# EAGLE board CzujnikWilgotnosciGleby_Rafal.Brauner (EAGLE 9.6.2)

Size 160 x 100 mm. Coordinates in mm from the lower left corner, seen from the top.
Outline: 0,0 160,0 160,100 0,100 0,0
Copper layers (1*16): Top 0.035mm / dielectric 1.5mm / Bottom 0.035mm
Design rules "default": minimum track width 6mil, minimum drill 0.35mm, track to track 6mil, track to pad 6mil, pad to pad 6mil, via to via 6mil, smd to smd 6mil, copper to edge 40mil, drill to drill 6mil, minimum pad ring 10mil, minimum via ring 8mil, stop-mask expansion 4mil, vias tented up to drill 0mil, thermal gap 10mil

## Footprints (pad centres in the part's own frame; a part is rotated, then mirrored left to right if it is on the bottom)
0603 = smd 1.1 x 1: 1 -0.85,0; 2 0.85,0
AB9V = drill 1.118 pad 3.15 octagon: + 0,2.54; - 0,-2.54
DIL28-3 = drill 0.813 long: 1 -16.51,-3.81; 2 -13.97,-3.81; 3 -11.43,-3.81; 4 -8.89,-3.81; 5 -6.35,-3.81; 6 -3.81,-3.81; 7 -1.27,-3.81; 8 1.27,-3.81; 9 3.81,-3.81; 10 6.35,-3.81; 11 8.89,-3.81; 12 11.43,-3.81; 13 13.97,-3.81; 14 16.51,-3.81; 15 16.51,3.81; 16 13.97,3.81; 17 11.43,3.81; 18 8.89,3.81; 19 6.35,3.81; 20 3.81,3.81; 21 1.27,3.81; 22 -1.27,3.81; 23 -3.81,3.81; 24 -6.35,3.81; 25 -8.89,3.81; 26 -11.43,3.81; 27 -13.97,3.81; 28 -16.51,3.81
TO220H = drill 1.118 long: 1 -2.54,-10.16; 2 0,-10.16; 3 2.54,-10.16 | hole 3.302: 0,4.826
AC01 = drill 1.1 pad 2: 1 -8.9,0; 2 8.9,0
RDT1034 = drill 0.8: A 3.175,-0.635; A1 -3.175,0.635; B 0.65,1.9
SOIL-MOISTURE-SENSOR = drill 1 square: J1.1 -11.43,-3.81; J2.1 13.335,-1.27 | drill 1: J1.2 -11.43,-1.27; J1.3 -11.43,1.27; J1.4 -11.43,3.81; J2.2 13.335,1.27 | hole 3.2: -6.35,0
HC49US = drill 0.7 pad 1.651: 1 -2.54,0; 2 2.54,0

## Placement (x,y rotation side)
C1  100pF  [0603]  -26.67,67.31 0 top  (outside the outline)
C2  100pF  [0603]  -30.48,67.31 0 top  (outside the outline)
G1  AB9V  [AB9V]  -17.78,59.69 0 top  (outside the outline)
IC1  ATMEGA328-20P  [DIL28-3]  -31.75,48.26 0 top  (outside the outline)
IC2  LM1117T(H)-5.0  [TO220H]  -21.59,34.29 0 top  (outside the outline)
R1  100k  [AC01]  -44.45,55.88 0 top  (outside the outline)
S1  RDT1034  [RDT1034]  -29.21,59.69 0 top  (outside the outline)
U$1  SOIL-MOISTURE-SENSOR  [SOIL-MOISTURE-SENSOR]  -29.21,11.43 0 top  (outside the outline)
Y1  [HC49US]  -19.05,67.31 0 top  (outside the outline)

## Library data of the parts
C1 C2 = SparkFun-Capacitors; PROD_ID: CAP-07883
G1 = battery
IC1 = atmega328_Rafal.Brauner
IC2 = lm1117_10; MF: Texas Instruments; MPN: LM1117T-5.0; OC_FARNELL: 1215183; OC_NEWARK: 41K3491
R1 = resistor-power; OC_FARNELL: unknown; OC_NEWARK: unknown
S1 = switch
U$1 = diy-modules
Y1 = SparkFun-Clocks

## Nets
N$1: G1.+ IC2.3
N$2: C1.2 IC1.7 IC1.20 IC2.2 R1.2 U$1.J1.4
N$4: IC1.1 S1.A1
N$5: R1.1 S1.B
N$6: C1.1 IC1.9 Y1.2
N$7: C2.2 G1.- IC1.8 IC1.22 IC2.1 U$1.J1.3
N$8: C2.1 IC1.10 Y1.1
N$12: IC1.28 U$1.J1.1

## Tracks (layer width: path | path; a pad name or v marks a point on that pad's centre or on a via)
N$1  (1 unrouted)
N$2  (5 unrouted)
N$4  (1 unrouted)
N$5  (1 unrouted)
N$6  (2 unrouted)
N$7  (5 unrouted)
N$8  (2 unrouted)
N$12  (1 unrouted)